# EAGLE board ASM2027 (EAGLE 6.3)
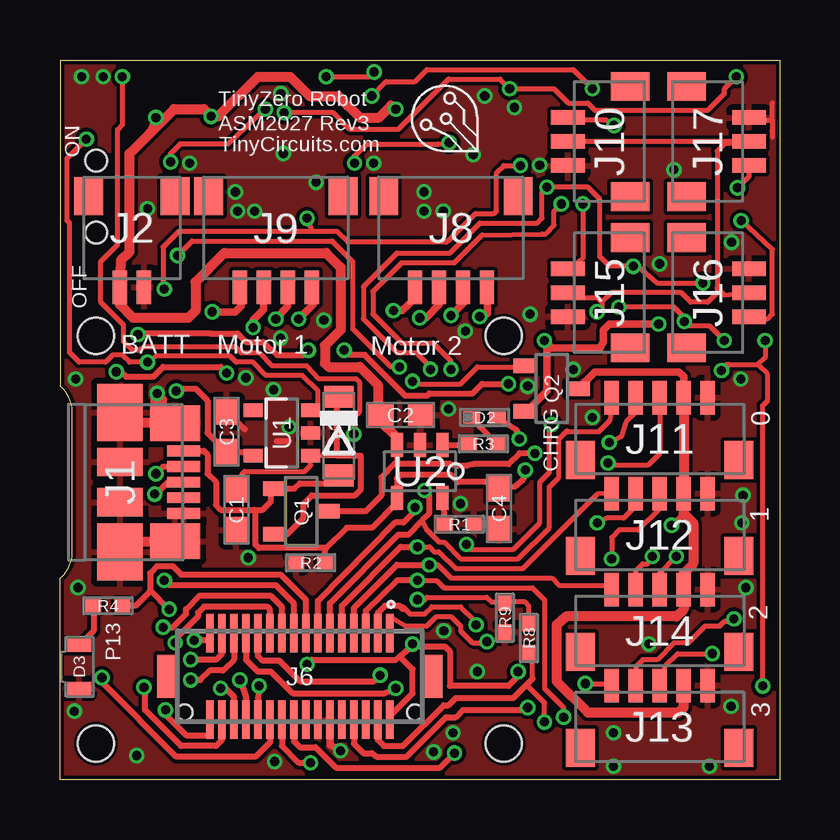
[diagram p0: board, top side]
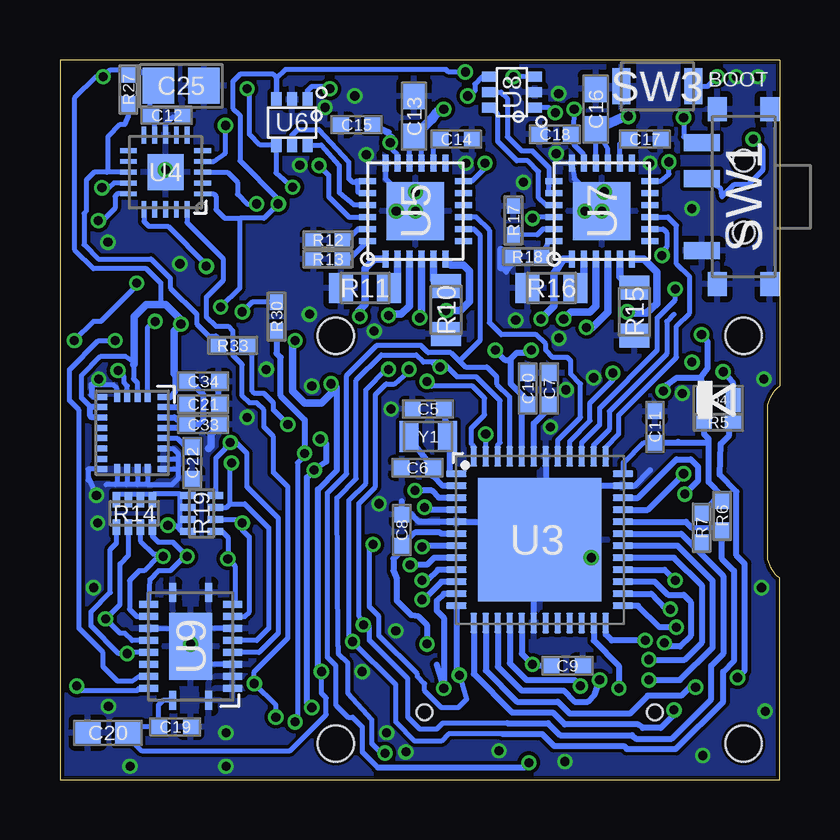
[diagram p1: board, bottom side, seen from below]

Size 30 x 30 mm. Coordinates in mm from the lower left corner, seen from the top.
Outline: 0,30 0,16.4 arc-45 0.5,15.5 0.5,9.3 arc-45 0,8.4 0,0 30,0 30,30 0,30
Copper layers (1*16): Top 0.035mm / dielectric 1.5mm / Bottom 0.035mm
Design rules "default *": minimum track width 8mil, minimum drill 15mil, track to track 6mil, track to pad 6mil, pad to pad 6mil, via to via 6mil, smd to smd 6mil, copper to edge 6mil, drill to drill 8mil, minimum pad ring 8mil, minimum via ring 5mil, stop-mask expansion 4mil, vias tented up to drill 25mil, thermal gap 10mil
Holes 1.5 mm at 1.5,18.5 18.5,18.5 1.5,1.5 18.5,1.5
bRestrict: 15 lines

## Footprints (pad centres in the part's own frame; a part is rotated, then mirrored left to right if it is on the bottom)
C0603 = smd 1.1 x 1: 1 -0.85,0; 2 0.85,0
C0402 = smd 0.65 x 0.6: 1 -0.65,0; 2 0.65,0
C0805 = smd 1.3 x 1.5: 1 -0.95,0; 2 0.95,0
SOD-123FL = smd 0.914 x 1.219: A 1.638,0; C -1.638,0
0402_LED = smd 0.7 x 0.5: 1 -0.55,0; 2 0.55,0
LNJ_LED = smd 1 x 0.55: A 0,0.9; C 0,-0.9
0603 = smd 0.61 x 0.991: A 0.622,0; C -0.622,0
MICRO_USB = smd 1.38 x 0.45: 1 2.66,1.3; 2 2.66,0.65; 3 2.66,0; 4 2.66,-0.65; 5 2.66,-1.3 | smd 2.1 x 1.475: P1 2.3,-2.462; P2 2.3,2.462 | smd 1.9 x 2.375: P3 0,2.913; P4 0,-2.913 | smd 1.9 x 1.175: P5 0,0.838; P6 0,-0.838
JST_SH_2X1 = smd 0.6 x 1.4: 1 -0.5,2.475; 2 0.5,2.475 | smd 1.2 x 1.6: PAD1 -1.8,-1.325; PAD2 1.8,-1.325
DF12-32-DP = smd 0.3 x 1.6: 1 -3.75,-1.8; 2 -3.75,1.8; 3 -3.25,-1.8; 4 -3.25,1.8; 5 -2.75,-1.8; 6 -2.75,1.8; 7 -2.25,-1.8; 8 -2.25,1.8; 9 -1.75,-1.8; 10 -1.75,1.8; 11 -1.25,-1.8; 12 -1.25,1.8; 13 -0.75,-1.8; 14 -0.75,1.8; 15 -0.25,-1.8; 16 -0.25,1.8; 17 0.25,-1.8; 18 0.25,1.8; 19 0.75,-1.8; 20 0.75,1.8; 21 1.25,-1.8; 22 1.25,1.8; 23 1.75,-1.8; 24 1.75,1.8; 25 2.25,-1.8; 26 2.25,1.8; 27 2.75,-1.8; 28 2.75,1.8; 29 3.25,-1.8; 30 3.25,1.8; 31 3.75,-1.8; 32 3.75,1.8 | smd 0.9 x 1.8: F1 -5.5,0; F2 5.5,0 | hole 0.65: -4.8,1.5; 4.8,1.5
JST_SH_4X1 = smd 0.6 x 1.4: 1 -1.5,2.475; 2 -0.5,2.475; 3 0.5,2.475; 4 1.5,2.475 | smd 1.2 x 1.6: PAD1 -2.8,-1.325; PAD2 2.8,-1.325
JST_SH_3X1_VERT = smd 0.6 x 1.4: 1 -1,-1.725; 2 0,-1.725; 3 1,-1.725 | smd 1.2 x 1.6: PAD1 -2.3,0.875; PAD2 2.3,0.875
JST_SH_5X1_VERT = smd 0.6 x 1.4: 1 -2,-1.725; 2 -1,-1.725; 3 0,-1.725; 4 1,-1.725; 5 2,-1.725 | smd 1.2 x 1.6: PAD1 -3.3,0.875; PAD2 3.3,0.875
SOT23A = smd 0.6 x 1: B -0.95,-1.1; C 0,1.1; E 0.95,-1.1
0402 = smd 0.65 x 0.55: 1 -0.6,0; 2 0.6,0
R0805 = smd 1 x 1.25: 1 -1,0; 2 1,0
0402RPACK = smd 0.3 x 0.65: 1 -0.75,0.575; 2 -0.75,-0.575; 3 -0.25,0.575; 4 -0.25,-0.575; 5 0.25,0.575; 6 0.25,-0.575; 7 0.75,0.575; 8 0.75,-0.575
PCM12SMTR = smd 0.7 x 1.5: 1 -2.25,1.75; 2 0.75,1.75; 3 2.25,1.75 | smd 1 x 0.8: W1 -3.65,1.1; W2 -3.65,-1.1; W3 3.65,-1.1; W4 3.65,1.1 | hole 0.9: 1.5,0; -1.5,0
KXT_LHS = smd 1.5 x 0.75: 1 0,1.5; 2 0,-1.5
SOT-25 = smd 0.55 x 0.8: 1 -0.95,-1.2; 2 0,-1.2; 3 0.95,-1.2; 4 0.95,1.2; 5 -0.95,1.2
SOT-23 = smd 0.5 x 1: 1 -0.95,-1.1; 2 0,-1.1; 3 0.95,-1.1; 4 0.95,1.1; 5 -0.95,1.1
QFN48 = smd 0.85 x 0.28: 1 -3.475,2.75; 2 -3.475,2.25; 3 -3.475,1.75; 4 -3.475,1.25; 5 -3.475,0.75; 6 -3.475,0.25; 7 -3.475,-0.25; 8 -3.475,-0.75; 9 -3.475,-1.25; 10 -3.475,-1.75; 11 -3.475,-2.25; 12 -3.475,-2.75; 25 3.475,-2.75; 26 3.475,-2.25; 27 3.475,-1.75; 28 3.475,-1.25; 29 3.475,-0.75; 30 3.475,-0.25; 31 3.475,0.25; 32 3.475,0.75; 33 3.475,1.25; 34 3.475,1.75; 35 3.475,2.25; 36 3.475,2.75 | smd 0.28 x 0.85: 13 -2.75,-3.475; 14 -2.25,-3.475; 15 -1.75,-3.475; 16 -1.25,-3.475; 17 -0.75,-3.475; 18 -0.25,-3.475; 19 0.25,-3.475; 20 0.75,-3.475; 21 1.25,-3.475; 22 1.75,-3.475; 23 2.25,-3.475; 24 2.75,-3.475; 37 2.75,3.475; 38 2.25,3.475; 39 1.75,3.475; 40 1.25,3.475; 41 0.75,3.475; 42 0.25,3.475; 43 -0.25,3.475; 44 -0.75,3.475; 45 -1.25,3.475; 46 -1.75,3.475; 47 -2.25,3.475; 48 -2.75,3.475 | smd 5.15 x 5.15: EXP 0,0
VQFN-20 = smd 0.7 x 0.2: 1 -1.55,0.9; 2 -1.55,0.45; 3 -1.55,0; 4 -1.55,-0.45; 5 -1.55,-0.9; 11 1.55,-0.9; 12 1.55,-0.45; 13 1.55,0; 14 1.55,0.45; 15 1.55,0.9 | smd 0.2 x 0.7: 6 -0.9,-1.55; 7 -0.45,-1.55; 8 0,-1.55; 9 0.45,-1.55; 10 0.9,-1.55; 16 0.9,1.55; 17 0.45,1.55; 18 0,1.55; 19 -0.45,1.55; 20 -0.9,1.55 | smd 1.5 x 1.5: PAD 0,0
VQFN-24_4X4 = smd 0.7 x 0.25: 1 -2,1.25; 2 -2,0.75; 3 -2,0.25; 4 -2,-0.25; 5 -2,-0.75; 6 -2,-1.25; 13 2,-1.25; 14 2,-0.75; 15 2,-0.25; 16 2,0.25; 17 2,0.75; 18 2,1.25 | smd 0.25 x 0.7: 7 -1.25,-2; 8 -0.75,-2; 9 -0.25,-2; 10 0.25,-2; 11 0.75,-2; 12 1.25,-2; 19 1.25,2; 20 0.75,2; 21 0.25,2; 22 -0.25,2; 23 -0.75,2; 24 -1.25,2 | smd 2.4 x 2.4: PAD 0,0
SOT-353-6 = smd 0.42 x 0.6: 1 -0.65,-0.95; 2 0,-0.95; 3 0.65,-0.95; 4 0.65,0.95; 5 0,0.95; 6 -0.65,0.95
VQFN-20_4.5X3.5 = smd 0.8 x 0.3: 1 -2.25,-0.75; 10 2.25,-0.75; 11 2.25,0.75; 20 -2.25,0.75 | smd 0.3 x 0.8: 2 -1.75,-1.75; 3 -1.25,-1.75; 4 -0.75,-1.75; 5 -0.25,-1.75; 6 0.25,-1.75; 7 0.75,-1.75; 8 1.25,-1.75; 9 1.75,-1.75; 12 1.75,1.75; 13 1.25,1.75; 14 0.75,1.75; 15 0.25,1.75; 16 -0.25,1.75; 17 -0.75,1.75; 18 -1.25,1.75; 19 -1.75,1.75 | smd 2.8 x 1.8: PAD 0,0
LGA-24 = smd 0.25 x 0.5: 1 -1.505,1.3; 6 -1.505,-1.3; 7 -1.075,-1.3; 8 -0.645,-1.3; 9 -0.215,-1.3; 10 0.215,-1.3; 11 0.645,-1.3; 12 1.075,-1.3; 13 1.505,-1.3; 18 1.505,1.3; 19 1.075,1.3; 20 0.645,1.3; 21 0.215,1.3; 22 -0.215,1.3; 23 -0.645,1.3; 24 -1.075,1.3 | smd 0.5 x 0.25: 2 -1.55,0.645; 3 -1.55,0.215; 4 -1.55,-0.215; 5 -1.55,-0.645; 14 1.55,-0.645; 15 1.55,-0.215; 16 1.55,0.215; 17 1.55,0.645
ABS06 = smd 0.8 x 1.3: 1 -0.8,0; 2 0.8,0

## Placement (x,y rotation side)
C1  10uF  [C0603]  7.35,11.25 270 top
C2  4.7uF  [C0603]  14.2,15.2 0 top
C3  10uF  [C0603]  6.95,14.5 90 top
C4  10uF  [C0603]  18.3,11.3 270 top
C5  22pF  [C0402]  14.65,15.45 180 bottom
C6  22pF  [C0402]  15.1,13 180 bottom
C7  .1uF  [C0402]  9.6,16.3 90 bottom
C8  .1uF  [C0402]  15.75,10.4 90 bottom
C9  .1uF  [C0402]  8.85,4.75 0 bottom
C10  .1uF  [C0402]  10.5,16.3 90 bottom
C11  .1uF  [C0402]  5.2,14.7 90 bottom
C12  0.1uF  [C0402]  25.55,27.7 0 bottom
C13  10uF  [C0603]  15.23,27.65 90 bottom
C14  10nF  [C0402]  13.48,26.7 0 bottom
C15  4.7uF  [C0402]  17.63,27.3 180 bottom
C16  10uF  [C0603]  7.66,27.95 90 bottom
C17  10nF  [C0402]  5.61,26.7 0 bottom
C18  4.7uF  [C0402]  9.36,26.9 180 bottom
C19  0.1uF  [C0402]  25.2,2.2 0 bottom
C20  10uF  [C0603]  28,1.95 180 bottom
C21  0.1uF  [C0402]  24.03,15.65 0 bottom
C22  10nF  [C0402]  24.48,13.2 270 bottom
C25  10uF  [C0805]  24.95,28.92 0 bottom
C33  0.1uF  [C0402]  24.03,14.8 0 bottom
C34  4.7uF  [C0402]  24.03,16.6 0 bottom
D1  MBR120  [SOD-123FL]  11.62,14.32 270 top
D2  AMBER  [0402_LED]  17.7,15.1 180 top
D3  GREEN  [LNJ_LED]  0.8,4.7 0 top
D4  CD0603  [0603]  2.55,15.82 0 bottom
J1  47346-0001  [MICRO_USB]  2.5,12.4 0 top
J2  SM02B-SRSS  [JST_SH_2X1]  3,23 180 top
J6  DF12-32-DP  [DF12-32-DP]  10,4.3 180 top
J8  SM04B  [JST_SH_4X1]  16.3,23 180 top
J9  SM04B  [JST_SH_4X1]  9,23 180 top
J10  SM03B-SRSS-TB  [JST_SH_3X1_VERT]  22.9,26.6 270 top
J11  SM05B  [JST_SH_5X1_VERT]  25,14.2 180 top
J12  SM05B  [JST_SH_5X1_VERT]  25,10.2 180 top
J13  SM05B  [JST_SH_5X1_VERT]  25,2.2 180 top
J14  SM05B  [JST_SH_5X1_VERT]  25,6.2 180 top
J15  SM03B-SRSS-TB  [JST_SH_3X1_VERT]  22.9,20.3 270 top
J16  SM03B-SRSS-TB  [JST_SH_3X1_VERT]  27,20.3 90 top
J17  SM03B-SRSS-TB  [JST_SH_3X1_VERT]  27,26.6 90 top
Q1  DMP2035U  [SOT23A]  10.06,11.18 270 top
Q2  DMP2035U  [SOT23A]  20.5,16.3 270 top
R1  5.0K  [0402]  16.65,10.65 0 top
R2  100k  [0402]  10.45,9.04 0 top
R3  1k  [0402]  17.65,14 180 top
R4  1k  [0402]  2,7.25 0 top
R5  10K  [0402]  2.55,14.9 180 bottom
R6  10K  [0402]  2.4,11 90 bottom
R7  10K  [0402]  3.25,10.5 90 bottom
R8  1M  [0402]  19.55,5.9 270 top
R9  1M  [0402]  18.55,6.75 90 top
R10  0.1  [R0805]  13.9,19.58 90 bottom
R11  0.1  [R0805]  17.28,20.5 0 bottom
R12  49.9K  [0402]  18.83,22.5 0 bottom
R13  49.9K  [0402]  18.83,21.7 0 bottom
R14  10K  [0402RPACK]  26.9,11.1 0 bottom
R15  0.1  [R0805]  6.05,19.51 90 bottom
R16  0.1  [R0805]  9.51,20.5 0 bottom
R17  49.9K  [0402]  11.1,23.31 270 bottom
R18  49.9K  [0402]  10.51,21.8 0 bottom
R19  10K  [0402RPACK]  24.1,11.1 90 bottom
R27  10.0K  [0402]  27.15,28.77 90 bottom
R30  0.0  [0402]  20.97,19.3 90 bottom
R33  1K  [0402]  22.8,18.1 180 bottom
SW1  PCM12SMTR  [PCM12SMTR]  1.5,24.3 90 bottom
SW3  KXT 331 LHS  [KXT_LHS]  5.1,28.9 270 bottom
U1  XC6210B33  [SOT-25]  9.25,14.45 90 top
U2  MCP73831  [SOT-23]  15,12.85 180 top
U3  ATSAMD21G18A  [QFN48]  10,10 0 bottom
U4  ATTINY841  [VQFN-20]  25.6,25.32 180 bottom
U5  DRV8834  [VQFN-24_4X4]  15.18,23.7 90 bottom
U6  MCP4018-10K  [SOT-353-6]  20.33,27.4 180 bottom
U7  DRV8834  [VQFN-24_4X4]  7.41,23.7 90 bottom
U8  MCP4018-10K  [SOT-353-6]  11.15,28.66 90 bottom
U9  PCA9544A  [VQFN-20_4.5X3.5]  24.55,5.55 90 bottom
U16  LSM9DS1  [LGA-24]  26.98,14.45 270 bottom
U$1  [DOCFIELD-TINYCIRCUITS-PCB]  41,-10 0 top  (outside the outline)
Y1  32.7680  [ABS06]  14.65,14.3 180 bottom

## Library data of the parts
C1 C4 = tinycircuits; DATABASE: ./../../../../../Components/TinyCircuits_Part_Database.txt; PARTNO: AS-ITM-00002
C2 = tinycircuits; DATABASE: ./../../../../../Components/TinyCircuits_Part_Database.txt; PARTNO: AS-ITM-00088
C3 C13 C16 C20 = tinycircuits; PARTNO: AS-ITM-00002
C5 C6 = tinycircuits; PARTNO: AS-ITM-00211
C7 C9 C10 = tinycircuits; DATABASE: ./../../../../../Components/TinyCircuits_Part_Database.txt; PARTNO: AS-ITM-00008; VALUE: 0.1uF
C8 C11 = tinycircuits; PARTNO: AS-ITM-00008; VALUE: 0.1uF
C12 C19 C21 = tinycircuits; PARTNO: AS-ITM-00008
C14 C17 C22 = tinycircuits; PARTNO: AS-ITM-00084
C15 C18 = tinycircuits; PARTNO: AS-ITM-00242
C25 = tinycircuits; PARTNO: AS-ITM-00045
C33 = tinycircuits; DATABASE: ./../../../../../Components/TinyCircuits_Part_Database.txt; PARTNO: AS-ITM-00008
C34 = tinycircuits; DATABASE: ./../../../../../Components/TinyCircuits_Part_Database.txt; PARTNO: AS-ITM-00242
D1 = tinycircuits; PARTNO: AS-ITM-00111; PNPROTATION: 0; VALUE: MBR120VLSFT1G
D2 = tinycircuits; DATABASE: ./../../../../../Components/TinyCircuits_Part_Database.txt; PARTNO: AS-ITM-00058
D3 = tinycircuits; PARTNO: AS-ITM-00011; PNPROTATION: 90
D4 = tinycircuits; PARTNO: AS-ITM-00009; PNPROTATION: 0
J1 = tinycircuits; PARTNO: AS-ITM-00021; PNPROTATION: 90
J2 = tinycircuits; PARTNO: AS-ITM-00231; PNPROTATION: 180; VALUE: SM02B-SRSS-TB(LF)(SN)
J6 = tinycircuits; PARTNO: AS-ITM-00015; PNPROTATION: 0
J8 J9 = tinycircuits; PARTNO: AS-ITM-00395; VALUE: SM05B
J10 J15-J17 = tinycircuits; PARTNO: AS-ITM-00471; VALUE: BM03B-SRSS-TB(LF)(SN)
J11-J14 = tinycircuits; PARTNO: AS-ITM-00391; PNPROTATION: 0; VALUE: BM05B
Q1 = tinycircuits; PARTNO: AS-ITM-00024; PNPROTATION: 0
Q2 = tinycircuits; DATABASE: ./../../../../../Components/TinyCircuits_Part_Database.txt; PARTNO: AS-ITM-00024; PNPROTATION: 0
R1 = tinycircuits; PARTNO: AS-ITM-00289; VALUE: 5K
R2 = tinycircuits; PARTNO: AS-ITM-00004; VALUE: 100K
R3 = tinycircuits; DATABASE: ./../../../../../Components/TinyCircuits_Part_Database.txt; PARTNO: AS-ITM-00003; VALUE: 1.00K
R4 R33 = tinycircuits; PARTNO: AS-ITM-00003; VALUE: 1.00K
R5 R6 = tinycircuits; PARTNO: AS-ITM-00032; VALUE: 10.0K
R7 = tinycircuits; DATABASE: ./../../../../../Components/TinyCircuits_Part_Database.txt; PARTNO: AS-ITM-00032; VALUE: 10.0K
R8 R9 = tinycircuits; DATABASE: ./../../../../../Components/TinyCircuits_Part_Database.txt; PARTNO: AS-ITM-00005; VALUE: 1.00M
R10 R11 R15 R16 = tinycircuits; PARTNO: AS-ITM-00157
R12 R13 R17 R18 = tinycircuits; PARTNO: AS-ITM-00074
R14 R19 = tinycircuits; PARTNO: AS-ITM-00520
R27 = tinycircuits; PARTNO: AS-ITM-00032
R30 = tinycircuits; PARTNO: AS-ITM-00076
SW1 = tinycircuits; PARTNO: AS-ITM-00220; PNPROTATION: 0
SW3 = tinycircuits; PARTNO: AS-ITM-00372
U1 = tinycircuits; PARTNO: AS-ITM-00046; PNPROTATION: 270
U2 = tinycircuits; PARTNO: AS-ITM-00136; PNPROTATION: 270
U3 = tinycircuits; PARTNO: AS-ITM-00273; PNPROTATION: 270
U4 = tinycircuits; PARTNO: AS-ITM-00255; PNPROTATION: 0
U5 U7 = tinycircuits; PARTNO: AS-ITM-00392; PNPROTATION: 0
U6 U8 = tinycircuits; PARTNO: AS-ITM-00393; PNPROTATION: 90
U9 = tinycircuits; PARTNO: AS-ITM-00342; PNPROTATION: 0
U16 = tinycircuits; PARTNO: AS-ITM-00265; PNPROTATION: 0
U$1 = tinycircuits; NO_BOM: TRUE
Y1 = tinycircuits; PARTNO: AS-ITM-00279; PNPROTATION: 0

## Nets
3V3: J11.2 J12.2 J13.2 J14.2 Q2.C R14.1 R14.3 R14.5 R14.7 R19.1 R19.3 R19.5 R19.7
+3V3: J6.6
+5V: C4.1 D1.A D2.1 J1.1 J6.8 Q1.B R2.2 U2.4
AD0: J6.11 J11.5 U3.3
AD1: J6.9 J12.5 U3.7
AD2: J6.7 J14.5 U3.8
AD3: J6.5 J13.5 U3.9 U4.20
AD4: R8.1 R9.2 U3.10
AD4/SDA: J6.3 R7.1 U3.31 U4.16 U6.4 U8.4 U9.19 U16.4
AD5: SW3.1 U3.47
AD5/SCL: J6.1 R6.1 U3.32 U4.1 U6.3 U8.3 U9.18 U16.2
AOUT1: J8.1 U5.1
AOUT2: J8.2 U5.3
AOUT3: J9.1 U7.1
AREF: J6.13 U3.4
ATN/IO38: U3.22
BOUT1: J8.4 U5.6
BOUT2: J8.3 U5.4
BOUT3: J9.4 U7.6
BOUT4: J9.3 U7.4
CE: SW1.2 U1.3
GND: C1.2 C2.2 C3.2 C4.2 C5.2 C6.2 C7.2 C8.2 C9.2 C10.2 C11.2 C12.2 C13.2 C14.2 C15.2 C16.2 C17.2 C18.2 C19.2 C20.2 C21.2 C22.2 C25.2 C33.2 C34.2 D3.C J1.5 J1.P1 J1.P2 J1.P3 J1.P4 J1.P5 J1.P6 J2.1 J6.12 J6.14 J10.3 J11.1 J12.1 J13.1 J14.1 J15.3 J16.3 J17.3 R1.2 R2.1 R9.1 R10.1 R11.1 R12.1 R13.1 R15.1 R16.1 R17.1 R18.1 SW1.1 SW1.W1 SW1.W2 SW1.W3 SW1.W4 SW3.2 U1.2 U2.2 U3.5 U3.18 U3.35 U3.42 U3.EXP U4.8 U4.PAD U5.18 U5.PAD U6.2 U7.18 U7.PAD U8.2 U9.1 U9.2 U9.3 U9.4 U9.7 U9.10 U9.11 U9.14 U9.PAD U16.5 U16.6 U16.13 U16.14 U16.15 U16.16 U16.17 U16.18 U16.19 U16.20
IO0: J6.24 U3.16
IO1: J6.26 U3.15
IO2: J6.28 U3.23
IO3: J6.30 U3.14
IO4: J6.32 U3.13
IO5: J6.31 U3.24
IO6: J6.29 U3.29
IO7: J6.27 U3.30
IO8: J6.25 U3.11
IO9: J6.23 R33.1 U3.12
IO25: Q2.B U3.48
IO26: U3.39 U5.22 U7.22
IO27: U3.41 U5.9
IO30: U3.37 U7.9
IO31: U3.38
MISO: J6.17 U3.28
MISO_ALT: U3.21
MOSI: J6.19 U3.25
MOSI_ALT: U3.19
N$1: C5.1 U3.1 Y1.1
N$2: U4.11
N$3: C6.1 U3.2 Y1.2
N$4: D3.A R4.1
N$5: D2.2 R3.1
N$6: R1.1 U2.5
N$7: R3.2 U2.1
N$8: C7.1 U3.43
N$9: R10.2 U5.5
N$10: R11.2 U5.2
N$11: U5.19 U5.20 U6.5
N$12: U5.21 U6.6
N$13: U4.12
N$14: C14.1 U5.14
N$15: R12.2 U5.23
N$16: R13.2 U5.24
N$17: U5.11
N$18: U5.10
N$20: U4.2
N$21: J9.2 U7.3
N$22: U4.5
N$23: U5.13
N$24: C15.1 U5.12 U5.17
N$27: R15.2 U7.5
N$28: R16.2 U7.2
N$29: U7.19 U7.20 U8.5
N$30: U7.21 U8.6
N$31: C17.1 U7.14
N$32: R17.2 U7.23
N$33: R18.2 U7.24
N$34: U7.11
N$35: U7.10
N$40: U7.13
N$41: C18.1 U7.12 U7.17
N$52: C22.1 U16.21
N$53: C21.1 U16.24
N$59: U16.9
N$60: U16.10
N$61: U16.11
N$62: U16.12
RESET: D4.A J6.22 R5.1 U3.40
RSV2: J6.16
S1: J10.1 U4.4
S2: J15.1 U4.3
S3: J16.1 U4.15
S4: J17.1 U4.14
SCK: J6.15 R4.2 U3.26
SCK_ALT: U3.20
SCL0: J11.3 R19.6 U9.6
SCL1: J12.3 R19.2 U9.9
SCL2: J14.3 R14.6 U9.13
SCL3: J13.3 R14.2 U9.16
SDA0: J11.4 R19.8 U9.5
SDA1: J12.4 R19.4 U9.8
SDA2: J14.4 R14.8 U9.12
SDA3: J13.4 R14.4 U9.15
SS: J6.21 U3.27
SWCLK: J6.20 U3.45 U5.8
SWDIO: J6.18 U3.46 U7.8
TINY_RST: R27.1 R33.2 U4.13
USB_N: J1.2 U3.33
USB_P: J1.3 U3.34
VBATT: C2.1 C13.1 C16.1 J2.2 J6.4 Q1.C R8.2 R30.1 SW1.3 U2.3 U5.15 U5.16 U7.15 U7.16
VCC: C3.1 C8.1 C9.1 C10.1 C11.1 C12.1 C19.1 C20.1 C25.1 C33.1 C34.1 D4.C J6.2 Q2.E R5.2 R6.2 R7.2 R27.2 U1.5 U3.6 U3.17 U3.36 U3.44 U4.9 U6.1 U8.1 U9.20 U16.1 U16.3 U16.7 U16.8 U16.22 U16.23
VCC_IN: C1.1 D1.C Q1.E U1.1
VIN: J6.10
VSERVO: J10.2 J15.2 J16.2 J17.2 R30.2

## Tracks (layer width: path | path; a pad name or v marks a point on that pad's centre or on a via)
3V3  (via drill 0.38)
  Top 0.203: 25.7,2.7 25.8,2.8 | v25.5,10.6 26,11.1
  Top 0.303: 22.4,17 22.3,17 Q2.C
  Top 0.305: J11.2 26,16.8 25.8,17 22.4,17
  Top 0.406: J11.2 J12.2 26,11.1 26.4,10.7 26.4,9 26,8.6 J14.2 26,7.1 25.7,6.8 21.1,6.8 20.7,6.45 20.7,4.1 22,2.8 25.8,2.8 26,3 J13.2
  Bottom 0.203: 25,10.4 24.95,10.35 R19.1 | 25,10.4 25,10.9 | 25,10.9 25,11.4 | 25,11.4 25,11.82 | 25,11.82 R19.7 | R19.3 24.95,10.85 25,10.9 | R19.5 24.95,11.35 25,11.4 | 25,11.82 25,11.9 26.12,11.9 | 26.12,11.9 R14.7 | R14.1 27.7,11.73 27.7,11.9 27.2,11.9 | 27.2,11.9 26.6,11.9 | 26.6,11.9 26.12,11.9 | R14.3 27.2,11.73 27.2,11.9 | R14.5 26.6,11.73 26.6,11.9 | 25,10.4 25.2,10.6 v25.5,10.6
+5V  (via drill 0.38)
  Top 0.254: J6.8 12.25,1.5 12.65,1.1 13,1.1 13.2,0.95 14.45,0.95 16.1,2.6 16.5,2.6 16.8,2.9 19.4,2.9 v19.5,3 | J1.1 6,13.7 6.15,13.55 6.15,12.75 6.5,12.4 6.5,11.45 6.7,11.25 8.1,11.25 | 8.1,11.25 8.45,11.25 8.8,11.6 8.8,12.02 Q1.B 9.78,12.13 10,12.35 11.39,12.35 D1.A | D2.1 19,14.6 v19.15,14.2 | v19.4,12.9 19.3,12.5 18.95,12.2 C4.1 18.25,12.5 18.1,12.6 17.9,12.4 16.6,12.4 16.3,12.7 14.2,12.7 14.05,12.55 U2.4 14.05,11.55 13,10.5 11.95,10.5 11.1,9.65 | 11.1,9.65 8.3,9.65 8.15,9.8 8.15,11.2 8.1,11.25 | R2.2 11.05,9.6 11.1,9.65
  Bottom 0.254: v19.15,14.2 18.9,14 18.9,13.25 v19.4,12.9 19.7,12.6 19.7,3.2 v19.5,3
AD0  (via drill 0.38)
  Top 0.203: J11.5 22.92,14.98 22.45,14.5 21.15,14.5 21.15,14.55 20.8,14.2 20.8,12.6 20.4,12.2 20.4,10.5 19.1,9.2 16.7,9.2 16,9.9 15.8,9.9 15.3,10.4 15.1,10.8
  Top 0.254: J6.11 11.25,7.35 14.1,10.2 14.5,10.2 15.1,10.8 15.4,11.1 15.4,11.85 v15.2,12.05
  Bottom 0.254: U3.3 14.2,11.75 14.5,12.05 v15.2,12.05
AD1  (via drill 0.38)
  Top 0.203: J12.5 22.4,11.9 19.3,8.8 16.5,8.8 15.8,9.5 15.6,9.5 15.4,9.7 v14.9,9.7
  Top 0.254: J6.9 11.75,7.25 14.2,9.7 v14.9,9.7
  Bottom 0.254: U3.7 14.75,9.75 v14.9,9.7
AD2  (via drill 0.38)
  Top 0.203: v15.4,8.95 15.75,8.95 16.3,8.4 20.5,8.4 20.8,8.1 22.83,8.1 J14.5
  Top 0.254: J6.7 12.25,7.15 14.05,8.95 v15.4,8.95
  Bottom 0.254: U3.8 14.4,9.25 14.7,8.95 v15.4,8.95
AD3  (via drill 0.38)
  Top 0.203: v14.9,8.3 15.7,8.3 16,8 19.7,8 20.2,7.5 20.2,3.8 21,3 v21,2.6 | v21.9,4 22.8,4 22.9,3.9 22.98,3.9 J13.5
  Top 0.254: J6.5 12.75,7.05 14.05,8.3 v14.9,8.3
  Bottom 0.203: U4.20 24.7,23.22 23.2,21.72 23.2,20.8 23.9,20.1 23.9,19.3 23.5,18.9 23,18.9 22.8,18.7 22.8,17.7 22.4,17.3 22.4,16 22.1,15.7 21.8,15.7 21.5,15.4 21.5,14.7 21.1,14.3 21.1,12.8 20.5,12.2 20.5,5.9 21.9,4.5 v21.9,4 21,3.1 v21,2.6
  Bottom 0.254: U3.9 14.25,8.75 14.7,8.3 v14.9,8.3
AD4  (via drill 0.38)
  Top 0.203: R8.1 19.55,7.25 19.4,7.4 18.6,7.4 R9.2 18.5,7.4 18,7.4 17.8,7.6 15.3,7.6 15.2,7.5 v14.9,7.5
  Bottom 0.254: U3.10 14.1,8.25 14.75,7.6 15.05,7.6 14.95,7.5 v14.9,7.5
AD4/SDA  (via drill 0.38)
  Top 0.203: v17.35,6.45 17.25,6.65 16.7,7.2 15.5,7.2 15.2,6.9 14.6,6.9 14.3,7.2 14.3,7.1 | v27.58,17.05 27.68,17.08 27.9,17.3 | 27.9,17.3 29.1,17.3 | v15.45,17.1 15.55,17.1 14.85,17.8 14.05,17.8 12.65,19.2 12.65,20.55 14.05,21.95 16.25,21.95 17.5,23.2 19.9,23.2 20.1,23.4 20.1,24.5 v20.3,24.7 22,24.7 22.5,24.2 22.5,21.8 22.9,21.4 v23.9,21.4 24.1,21.4 24.9,20.7 v26.8,20.7 | v13,28.5 13.6,29.1 14.8,29.1 15.3,29.6 21.4,29.6 v22.2,28.8 | v29.3,3.9 29.3,15.6 29.5,15.8 29.5,16.9 29.1,17.3 | 27.9,17.3 27.8,17.3 27.6,17.1 | v29.4,18.3 29.4,17.6 29.1,17.3
  Top 0.254: J6.3 13.25,6.95 13.55,7.25 14.15,7.25 14.3,7.1
  Bottom 0.203: U16.4 27.2,16.41 27.33,16.55 27.33,16.8 v27.58,17.05 | v13,28.5 12.7,28.7 12.7,29 12.4,29.3 12.01,29.3 U8.4 | U4.16 26.5,23.27 26.3,23.07 25.5,23.07 23.9,21.47 v23.9,21.4 | U9.19 26.7,3.8 26.8,3.7 29.1,3.7 v29.3,3.9 | v22.2,28.8 22.1,28.7 22.1,26.9 21.65,26.45 U6.4 21,26.4 21,25.3 v20.3,24.7 | v26.8,20.7 26.8,20.6 28.3,19.1 28.6,19.1 v29.4,18.3 | 11.35,2.35 14.05,2.35 14.3,2.1 15,2.1 15.5,2.6 15.5,4.2 17.1,5.8 17.1,6.4 v17.35,6.45 17.55,6.85 17.55,11.5 16.85,12.2 16.85,16.05 16.4,16.5 16.05,16.5 15.5,17 15.45,17.05 v15.45,17.1
  Bottom 0.254: U3.31 4.1,10.25 3.53,9.68 | 3.53,9.68 2.35,8.5 2.35,5.25 2.85,4.75 2.85,3.35 4.5,1.7 6,1.7 6.15,1.85 9.15,1.85 9.65,2.35 11.35,2.35 | R7.1 3.47,9.68 3.53,9.68
AD5  (via drill 0.38)
  Top 0.203: v12.25,14.4 12.15,14.6 12.3,14.75 12.3,15.15 12.5,15.35 12.5,16.55 12.35,16.7 10.8,16.7 10.3,17.25 8.85,17.25 8.3,17.8 7.55,17.8 7.3,18.05 3.55,18.05 3.25,17.9 3,17.9 2.65,18.25 2.65,18.95 1.7,19.9 1.7,21.6 2.4,22.3 2.4,27.1 2.6,27.3 v2.6,29.3
  Bottom 0.203: U3.47 v12.25,14.4 | SW3.1 3,28.9 v2.6,29.3
AD5/SCL  (via drill 0.38)
  Top 0.203: v16.3,17.1 16.3,17.45 15.55,18.2 14.25,18.2 13.05,19.4 13.05,20.35 14.25,21.55 16.45,21.55 17.6,22.7 20.1,22.75 20.25,22.75 20.6,23.1 20.6,23.7 v20.9,24 | v11.1,29.3 12.9,29.3 v13.1,29.5 | v27.7,18.3 27.1,18.9 26.13,18.9 v26.03,19.1 26.03,19.27 25.6,19.7 v23.3,19.7 | 13.75,6.75 13.85,6.75 14.4,6.4 15.3,6.4 15.7,6.8 16.3,6.8 16.7,6.4 16.7,6.2 17.2,5.7 17.75,5.7 v17.8,5.75
  Top 0.254: J6.1 13.75,6.75
  Bottom 0.203: 3.65,10.5 2.6,10.5 2.5,10.4 R6.1 | U16.2 26.34,18.86 26.1,19.1 v26.03,19.1 | U8.3 10.99,29.31 v11.1,29.3 | v13.1,29.5 13.8,29.5 13.9,29.6 20.6,29.6 20.98,29.22 U6.3 20.88,28.37 20.95,28.3 20.95,29.25 21.1,29.4 22.5,29.4 22.8,29.1 22.8,28 22.5,27.7 22.5,25.8 20.9,24.2 v20.9,24 21.5,23.4 22.5,23.4 | U4.1 23.6,24.42 23.5,24.32 23.5,23.77 23.13,23.4 22.5,23.4 | U9.18 26.7,4.3 27,4.1 27.6,4.1 28.2,4.7 28.2,5.3 29.2,6.3 29.2,15.4 29.6,15.8 29.6,17.1 28.4,18.3 v27.7,18.3 | 22.5,23.4 22.5,20.5 v23.3,19.7 | 11.55,1.9 13.8,1.9 14.1,1.6 15.2,1.6 16,2.4 16,3.95 v17.8,5.75 17.95,5.9 17.95,11.65 17.25,12.35 17.25,16.25 16.4,17.1 v16.3,17.1
  Bottom 0.254: U3.32 3.9,10.75 3.65,10.5 | 11.55,1.9 9.9,1.9 9.4,1.4 6.5,1.4 6.38,1.28 4.32,1.28 2.35,3.25 2.35,4.5 1.9,4.95 1.9,8.7 2.4,9.2 R6.1
AOUT1  (via drill 0.38)
  Top 0.305: J8.1 17.82,19.42 v17.5,19.3
  Bottom 0.305: U5.1 16.88,21.7 17.28,21.3 17.28,19.8 17.55,19.53 v17.5,19.3
AOUT2  (via drill 0.38)
  Top 0.305: v16.3,19.35 16.82,19.87 J8.2
  Bottom 0.305: U5.3 15.43,19.75 15.78,19.4 16.2,19.4 v16.3,19.35
AOUT3  (via drill 0.38)
  Top 0.305: v9.95,19.2 10.55,19.8 10.55,20.36 J9.1
  Bottom 0.305: U7.1 9.01,21.7 9.41,21.1 9.41,19.74 v9.95,19.2
AREF  (via drill 0.38)
  Top 0.254: J6.13 10.75,7.45 13.98,10.72 14.32,10.72 14.8,11.2 v14.8,11.35
  Bottom 0.254: U3.4 14.6,11.25 v14.8,11.35
BOUT1  (via drill 0.38)
  Top 0.305: v13.9,19.55 14.25,19.55 14.8,20.05 J8.4
  Bottom 0.305: U5.6 13.93,21.68 13.7,21.45 13.18,21.45 12.93,21.2 12.93,19.92 13.3,19.55 v13.9,19.55
BOUT2  (via drill 0.38)
  Top 0.305: J8.3 15.82,19.82 15.25,19.25 v15,19.25
  Bottom 0.305: U5.4 14.93,19.45 14.89,19.21 14.9,19.2 v15,19.25
BOUT3  (via drill 0.38)
  Top 0.305: v6.35,19.5 7.3,19.5 7.55,19.75 7.55,20.36 J9.4
  Bottom 0.305: U7.6 5.66,21.7 5.11,21.15 5.11,19.84 5.55,19.45 6.2,19.45 v6.35,19.5
BOUT4  (via drill 0.38)
  Top 0.305: J9.3 8.49,19.59 8.05,19.15 v8.05,18.85
  Bottom 0.305: U7.4 7.16,19.5 7.81,18.85 v8.05,18.85
CE  (via drill 0.38)
  Top 0.203: U1.3 10.5,15.4 10.75,15.65 10.75,16.2 10.1,16.85 8.6,16.85 8.05,17.4 7.35,17.4 7.1,17.65 4,17.65 v3.65,17.4 2.9,17.4 2.6,17.7 2.2,17.7 1.9,17.4 0.8,17.4 0.4,17.8 0.4,23.2 0.3,23.3 0.3,25.9 v1.1,26.7
  Bottom 0.203: SW1.2 2.45,24.65 2.4,24.3 1.9,24.8 1.3,24.8 0.7,25.4 0.7,26.3 v1.1,26.7
GND  (via drill 0.38)
  Top 0.203: 5.21,14.45 J1.P2 | 2.8,9.9 2.8,9.79 J1.P4 | J17.3 29.2,27.5 29.7,27.5 | 29.7,27.5 29.7,26.8 | 29.7,27.5 29.7,28.2
  Top 0.254: J1.P2 4.3,14.86 4.35,14.91 4.35,15.85 4.05,16.15 | 2.95,14.86 J1.P3 | 9.55,14.1 9.05,14.1 | C3.2 7.7,14.6 | 4.1,14.96 4.1,15.9 | 3.9,14.96 3.9,15.9
  Top 0.305: J6.12 11.25,1.45 v11.7,1.2 | C4.2 18.1,10.65 R1.2
  Top 0.406: 4.3,14.86 2.95,14.86 | 2.8,9.9 4.8,9.9 J1.P1
  Bottom 0.203: U5.18 16.43,25.05 16.18,24.8 16.18,24.7 U5.PAD | U7.18 8.56,25.05 8.31,24.8 8.31,24.7 U7.PAD | 23.38,16.75 23.38,16.67 C34.2 | U16.5 27.62,16.3 27.78,16.45 28.63,16.45 28.68,16.35 | 28.68,16.05 28.63,15.95 U16.6 | U16.20 25.28,13.8 25.08,13.6 25.08,13.35 | 25.08,13.35 25.08,12.9 | 25.08,12.9 25.08,12.55 25.33,12.3 26.28,12.3 26.34,12.36 U16.17 26.34,12.3 26.33,12.3 26.78,12.3 | U16.19 25.1,13.38 25.08,13.35 | U16.18 25.12,12.95 25.08,12.9 | 26.78,12.3 27.23,12.3 | 27.23,12.3 27.68,12.3 | 27.68,12.3 28.08,12.3 | U16.16 26.77,12.32 26.78,12.3 | U16.15 27.2,12.34 27.23,12.3 | U16.14 27.62,12.36 27.68,12.3 | U16.13 28.83,12.95 28.83,12.48 28.8,12.55 v28.48,11.85 | R18.1 11.11,21.54 11.4,21.15 11.4,21.23 11.41,21.24 | U4.8 25.6,27.32 25.3,27.62 C12.2 | 11.6,10 11.95,10.35 11.95,10.75 | U9.14 25.3,6.3 v24.55,5.65 | U9.4 23.8,4.8 v24.55,5.65 | U9.7 23.8,6.3 v24.55,5.65 | 11.41,22 11.61,22.1
  Bottom 0.254: U3.42 9.75,11.1 v7.85,9.25 | v7.85,9.25 U3.EXP | U3.EXP 11.6,10 | U3.18 10.25,9.75 U3.EXP | 5.4,12.9 6.05,12.25 U3.35 7.9,12.25 v7.85,9.25 | 15.75,11.6 C8.2 15.45,11.15 15.05,10.75 U3.5 11.95,10.75 | v28.38,16.7 28.68,16.45 28.68,16.35 28.68,16.05 | C21.2 23.38,16.67 arc-45 23.42,16.59 C34.2
  Bottom 0.303: C33.2 23.38,14.72 23.7,14.4 23.7,13.9 23.8,13.8
  Bottom 0.305: 11.61,22.1 11.61,21.34 | 11.41,22 11.41,21.24
  other vias: 3.2,1 0.6,2.85 17.4,4.5 16.2,15.45 9.2,18.4 0.65,16.7 4.05,16.1 8.9,16.25 8.95,0.75 9.55,14.7 16.7,11.5 0.9,29.3 13.08,25.7 15.18,24.5 15.98,23.7 15.18,23.7 17.23,26.05 18.95,28.02 5.41,25.7 7.31,24.5 8.11,23.7 7.41,23.7 9.31,26.1 9.21,28.6 22.2,15.1 1.8,29.3 7.75,16.75 11,19.15 28.43,10.7 16.9,18.7 17.71,28.5 25.6,25.42 19.6,19.4 25,21.5 28,22.4 20,25.62 3.65,23.8 0.75,8 10.68,24.9 16,6.2 23.08,0.55 27.08,0.55 27.98,3.05 23.08,1.95 28.6,8 16.38,1.95 15.58,1.15 19.5,16.4 21.4,17.1
  pour Top: 0,30 30,30 30,0 0,0
  pour Bottom: 0,30 30,30 30,0 0,0
IO0  (via drill 0.38)
  Top 0.254: v8.3,3.9 8.25,3.4 J6.24
  Bottom 0.254: v8.3,3.9 8.55,4.15 10.55,4.15 11.25,4.85 U3.16
IO1  (via drill 0.38)
  Top 0.254: v7.5,4.15 7.75,3.4 J6.26
  Bottom 0.254: U3.15 11.75,4.7 10.75,3.7 9,3.7 8.55,3.25 8,3.25 7.7,3.55 v7.5,4.15
IO2  (via drill 0.38)
  Top 0.254: J6.28 7.25,3.45 6.9,3.8 v6.7,3.8
  Bottom 0.254: U3.23 7.75,5.8 6.7,4.75 v6.7,3.8
IO3  (via drill 0.38)
  Top 0.254: J6.30 6.75,1.65 6.5,1.4 5.05,1.4 3.55,2.9 3.55,3.8 v3.5,3.85
  Bottom 0.254: U3.14 12.25,4.55 10.95,3.25 9.25,3.25 8.75,2.75 6.25,2.75 5.5,3.5 4.1,3.5 3.75,3.85 v3.5,3.85
IO4  (via drill 0.38)
  Top 0.254: J6.32 6.25,1.95 6.15,1.85 5.25,1.85 4.4,2.7 v4.4,2.9
  Bottom 0.254: U3.13 12.75,4.4 11.15,2.8 9.45,2.8 8.95,2.3 5.9,2.3 5.7,2.15 4.95,2.15 4.4,2.7 v4.4,2.9
IO5  (via drill 0.38)
  Top 0.254: J6.31 6.25,5.8 v5.6,5.8
  Bottom 0.254: v5.6,5.8 7,5.8 7.25,6.05 U3.24
IO6  (via drill 0.38)
  Top 0.254: J6.29 6.75,5.25 6.5,5 v5.45,5
  Bottom 0.254: U3.29 4.4,9.25 3.25,8.1 3.25,5.7 3.95,5 v5.45,5
IO7  (via drill 0.38)
  Top 0.254: J6.27 7.25,5 6.8,4.55 6.25,4.55 5.85,4.15 v5.45,4.15
  Bottom 0.254: U3.30 4.25,9.75 2.8,8.3 2.8,5.5 4.15,4.15 v5.45,4.15
IO8  (via drill 0.38)
  Top 0.254: J6.25 7.75,5 8.25,4.5 8.8,4.5 9.7,3.6 13.55,3.6 v14,3.8
  Bottom 0.254: U3.11 14,7.75 14.3,7.45 14.3,7.05 14,6.75 v14,3.8 14.3,4.8
IO9  (via drill 0.38)
  Top 0.203: v16.95,9.8 17.1,9.6 18.9,9.6 20,10.7 20,12.4 20.4,12.8 20.4,14.6 v20.5,14.8
  Top 0.254: J6.23 8.25,5.15 8.45,4.95 9.15,4.95 10,4.1 13.1,4.1 v13.35,4.35
  Bottom 0.203: 13.48,4.47 v13.35,4.35 13.05,3.35 13.4,3 14.1,3 14.8,3.7 14.8,4 15.1,4.3 15.1,4.4 16.7,6 16.7,6.8 17.1,7.2 17.1,9.6 16.95,9.75 v16.95,9.8 | v20.5,14.8 21.1,15.4 21.1,15.7 21.5,16.1 21.9,16.1 22,16.2 22,17.9 R33.1
  Bottom 0.254: U3.12 13.48,4.47
IO25  (via drill 0.38)
  Top 0.203: v14.7,16.6 14.8,16.5 16.7,16.5 17.4,17.2 19.35,17.2 Q2.B
  Bottom 0.203: U3.48 12.75,13.9 12.85,14 12.85,14.65 12.3,15.2 12.3,15.9 12.8,16.4 14.5,16.4 v14.7,16.6
IO26  (via drill 0.38)
  Top 0.203: 10.5,22.85 11.55,22.85 12,22.4 16.1,22.4 16.15,22.45 16.18,22.45 17.33,23.6 18.1,23.6 18.2,23.7 18.2,25.3 18.5,25.6 v19.2,25.6 | 10.5,22.85 4.95,22.85 4.3,22.2 4.3,20.6 v4.35,20.45 | v10.3,23.4 10.5,22.85
  Bottom 0.203: U3.39 8.25,14.05 7.5,14.8 7.5,15.5 5.1,17.9 5.1,19.25 4.35,20 4.35,20.4 v4.35,20.45 | v19.2,25.6 18.8,25.2 18.8,24.3 17.95,23.45 U5.22 | U7.22 10.25,23.45 v10.3,23.4
IO27
  Bottom 0.203: U3.41 9.25,14.15 8.3,15.1 8.3,16.5 8.7,16.9 8.7,17.45 8.85,17.6 9.45,17.6 9.75,17.9 9.75,18.15 10.15,18.55 11.6,18.55 12.1,19.05 12.1,22.9 12.65,23.45 U5.9
IO30
  Bottom 0.203: U3.37 7.23,13.32 7.23,13.88 6.7,14.4 6.7,15.2 4.3,17.6 4.3,18.9 3.75,19.45 3.75,20.95 4.3,21.5 4.3,23.1 4.65,23.45 U7.9
IO31
  Bottom 0.203: 4.4,19.4 4.7,19.1 4.7,17.75 7.1,15.35 7.1,14.6 7.75,13.95 U3.38
MISO  (via drill 0.38)
  Top 0.254: J6.17 9.75,7.35 9,8.1 4.55,8.1 v4.35,8.3
  Bottom 0.254: U3.28 4.8,8.75 v4.35,8.3
MOSI  (via drill 0.38)
  Top 0.254: J6.19 9.25,7.2 8.8,7.65 5.8,7.65 5.25,7.1 5.25,6.9 4.7,6.35 v4.3,6.35
  Bottom 0.254: 6.5,7.23 U3.25 5.9,7.25 5,6.35 v4.3,6.35
N$1
  Bottom 0.254: C5.1 13.9,14.65 | 13.9,14.65 Y1.1 | U3.1 13.75,12.75 13.75,14.2 13.9,14.65
N$3
  Bottom 0.254: U3.2 14.05,12.25 14.45,12.65 C6.1 15.1,13.8 Y1.2
N$4
  Top 0.254: R4.1 1.4,6.2 D3.A
N$5
  Top 0.254: R3.1 18.2,14 17.5,14.7 17.5,14.75 D2.2
N$6
  Top 0.254: U2.5 R1.1
N$7
  Top 0.254: U2.1 17,13.95 R3.2
N$8
  Bottom 0.254: U3.43 10.25,14.85 9.75,15.35 9.6,15.35 9.5,15.45 C7.1 9.55,15.45
N$9
  Bottom 0.305: U5.5 14.43,20.85 R10.2
N$10
  Bottom 0.305: U5.2 15.93,20.85 R11.2
N$11
  Bottom 0.203: U5.19 17.63,24.95 17.68,24.9 | 17.68,24.9 17.8,24.9 17.95,25.05 17.95,25.75 19.2,27.1 20.1,27.1 20.33,26.87 U6.5 | U5.20 17.53,24.45 17.58,24.5 17.58,24.8 17.68,24.9
N$12
  Bottom 0.203: U5.21 17.75,23.95 18.35,24.45 18.35,25.6 19.1,26.45 U6.6
N$14
  Bottom 0.203: U5.14 14.43,26.6 C14.1
N$15
  Bottom 0.203: U5.23 17.58,22.95 18.03,22.5 R12.2
N$16
  Bottom 0.203: U5.24 17.93,21.7 R13.2
N$21  (via drill 0.38)
  Top 0.305: J9.2 9.49,19.74 v9,19.2
  Bottom 0.305: U7.3 7.66,19.75 7.91,19.5 8.7,19.5 v9,19.2
N$24  (via drill 0.38)
  Top 0.203: v12.28,25.7 12.28,26 12.78,26.5 15.78,26.5 v16.23,26.55
  Bottom 0.203: U5.17 15.93,26.05 16.13,26.25 16.13,26.8 C15.1 16.28,27 v16.23,26.55 | U5.12 12.83,24.95 12.28,25.5 v12.28,25.7
N$27
  Bottom 0.305: U7.5 6.66,20.96 6.5,20.8 6.56,20.85 R15.2
N$28
  Bottom 0.305: U7.2 8.16,20.85 R16.2
N$29
  Bottom 0.203: U7.19 9.6,24.95 | 9.6,24.95 9.61,24.95 9.61,24.75 | U7.20 9.61,24.45 9.61,24.75 | 9.61,24.75 9.6,25.04 | U8.5 11.61,28.66 11.35,28.4 11.35,26.8 10.75,26.2 10.3,26.2 9.6,25.5 9.6,25.04 | 9.6,24.95 9.6,25.04
N$30
  Bottom 0.203: U7.21 9.75,23.95 10.05,24.25 10.05,25.35 10.5,25.8 10.95,25.8 11.75,26.6 11.75,27.76 U8.6
N$31
  Bottom 0.203: U7.14 6.66,26.5 C17.1
N$32
  Bottom 0.203: U7.23 9.86,22.95 10.11,22.7 R17.2
N$33
  Bottom 0.203: U7.24 9.66,22.4 R18.2
N$41  (via drill 0.38)
  Top 0.203: v4.61,25.75 4.61,26.1 5.01,26.5 7.01,26.5 v8.56,27.95
  Bottom 0.203: U7.17 8.16,26.05 8.56,26.45 8.56,27 C18.1 8.61,27.05 v8.56,27.95 | U7.12 4.96,24.95 4.61,25.25 v4.61,25.75
N$52
  Bottom 0.203: U16.21 25.12,14.23 24.83,13.95 C22.1
N$53
  Bottom 0.203: 24.85,15.52 C21.1
  Bottom 0.254: U16.24 24.85,15.52
RESET  (via drill 0.38)
  Top 0.254: J6.22 8.75,1.55 8.15,0.95 4.85,0.95 1.75,4.05 v1.75,4.25 | v2.35,17 2.55,17 2.75,16.8 3.9,16.8 4.3,17.2 6.7,17.2 v6.95,16.95
  Bottom 0.203: U3.40 8.75,14.1 7.9,14.95 7.9,15.7 6.95,16.65 v6.95,16.95
  Bottom 0.254: v1.75,4.25 1.45,4.55 1.45,9 1.8,9.35 1.8,12 2.5,12.7 2.45,14 2.1,14.35 2.1,14.75 R5.1 1.95,15.8 D4.A 1.93,16.53 v2.35,17
S1  (via drill 0.38)
  Top 0.203: v23.1,27.27 22.77,27.5 21.8,27.5 21.7,27.6 J10.1
  Bottom 0.203: U4.4 23.6,25.77 23.1,26.12 v23.1,27.27
S2  (via drill 0.38)
  Top 0.203: v21.8,24 21.8,21.73 J15.1
  Bottom 0.203: U4.3 23.02,25.32 22.6,24.9 22.6,24.4 22.2,24 v21.8,24
S3  (via drill 0.38)
  Top 0.203: J16.1 29.5,19.2 29.7,19.4 29.7,22.1 v28.4,23.3
  Bottom 0.203: U4.15 27.6,24.42 27.7,24.32 27.7,23.82 28.22,23.3 v28.4,23.3
S4  (via drill 0.38)
  Top 0.203: J17.1 28.73,25.15 v28.25,24.67
  Bottom 0.203: U4.14 27.75,24.87 27.95,24.67 v28.25,24.67
SCK  (via drill 0.38)
  Top 0.254: J6.15 10.25,7.5 9.2,8.55 5.05,8.55 4.7,8.9 4.05,8.9 3.75,8.6 3.75,7.9 | R4.2 3.15,7.25 3.75,7.85 3.75,7.9 | 3.75,7.9 v4.55,7.1
  Bottom 0.254: U3.26 5.35,7.75 4.75,7.1 v4.55,7.1
SCL0  (via drill 0.38)
  Top 0.203: 23,13.2 v22.85,13.2 22.95,13.1 24.5,13.1 25,13.6 J11.3
  Bottom 0.203: U9.6 21.8,5.8 21.3,6.3 21.3,10.5 22.3,11.5 22.9,11.5 | 22.8,13.2 v22.85,13.2 22.9,13.15 22.9,11.5 | R19.6 23.05,11.35 22.9,11.5
SCL1  (via drill 0.38)
  Top 0.203: 25,11.4 J12.3 25,11.3 24.1,10.4 23.3,10.4 23,10.1 v23,9.2
  Bottom 0.203: U9.9 22.7,7.45 22.7,8.9 v23,9.2 23,10.1 23.25,10.35 R19.2
SCL2  (via drill 0.38)
  Top 0.203: J14.3 25,8.6 v25.7,9.3
  Bottom 0.203: U9.13 26.8,6.8 27.1,7.1 27.1,8.3 26.7,8.7 26.5,8.7 25.9,9.3 v25.7,9.3 25.8,9.4 26.1,9.4 26.65,9.95 R14.6
SCL3  (via drill 0.38)
  Top 0.203: v27.2,5.25 25.75,5.25 25.2,4.7 25.2,4.12 J13.3
  Bottom 0.203: R14.2 27.65,9.85 27.9,9.6 27.9,7.8 28.7,7 28.7,6.4 27.55,5.25 v27.2,5.25 27.15,5.3 U9.16
SDA0  (via drill 0.38)
  Top 0.203: J11.4 24,15.3 23.6,14.9 23.4,14.3 v22.9,14.05
  Bottom 0.203: U9.5 21.7,5.3 20.9,6.1 20.9,10.9 22.2,12.2 22.2,13.6 22.65,14.05 v22.9,14.05 23.1,13.85 23.1,13.8 23.5,13.4 23.5,11.93 R19.8
SDA1  (via drill 0.38)
  Top 0.203: J12.4 24,11.4 23.5,10.9 22.8,10.9 v22.4,10.7
  Bottom 0.203: U9.8 22.3,6.8 22.1,7 22.1,10.1 22.4,10.4 v22.4,10.7 22.55,10.85 R19.4
SDA2  (via drill 0.38)
  Top 0.203: J14.4 24,8.7 24.3,9 24.5,9 v24.7,9.3
  Bottom 0.203: U9.12 26.25,8.35 25.9,8.7 25.4,8.7 24.9,9.2 24.9,9.3 v24.7,9.3 25.3,9.9 25.9,9.9 26.15,10.15 R14.8
SDA3  (via drill 0.38)
  Top 0.203: v28.1,6.7 28,6.6 27.7,6.6 27.5,6.4 26.9,6.4 26.2,5.7 25.6,5.7 24.9,5 24.3,5 24,4.7 J13.4
  Bottom 0.203: U9.15 27,5.8 27.3,6.1 27.5,6.1 v28.1,6.7 27.5,7.3 27.5,9 27.15,9.35 R14.4
SS  (via drill 0.38)
  Top 0.254: J6.21 8.75,7.1 8.65,7.2 6,7.2 5.75,6.95 5.75,6.8 4.8,5.85 v4.8,5.7
  Bottom 0.254: U3.27 5.2,8.25 4.65,7.7 4,7.7 3.7,7.4 3.7,6 4.15,5.55 4.65,5.55 v4.8,5.7
SWCLK  (via drill 0.38)
  Top 0.254: J6.20 9.25,1.4 9.95,0.7 v10.45,0.7
  Bottom 0.203: U3.45 11.25,15.95 11.8,16.5 11.8,16.8 12.2,17.2 13.1,17.2 13.35,17.45 | 13.35,17.45 13.7,17.8 14.65,17.8 14.95,18.1 16.8,18.1 18.05,16.85 18.05,12.75 18.85,11.95 18.85,5.1 18.5,4.75 18.5,3.1 18,2.6 17.8,2.6 17.4,2.2 17.4,1.15 16.75,0.5 | U5.8 12.75,22.95 12.5,22.7 12.5,18.3 13.35,17.45
  Bottom 0.254: v10.45,0.7 10.65,0.5 16.75,0.5
SWDIO  (via drill 0.38)
  Top 0.203: v14.15,17.2 13.8,17.2 12.2,18.8 12.2,21.6 11.35,22.45 5.5,22.45 v4.9,21.85
  Top 0.254: J6.18 9.75,1.6 10,1.35 10.65,1.35 11.5,0.5 15.85,0.5 v16.45,1.1
  Bottom 0.203: U3.46 11.75,13.95 11.65,14.05 11.65,15.8 12.65,16.8 13.45,16.8 14.05,17.4 14.4,17.4 | 14.4,17.4 14.85,17.4 15.15,17.7 16.6,17.7 17.65,16.65 17.65,12.55 18.45,11.75 18.4,5.55 18.4,5.25 18,4.85 18,3.6 17,2.5 17,1.5 16.5,1 v16.45,1.1 | U7.8 4.85,22.95 4.7,22.8 4.7,22.2 4.95,21.95 v4.9,21.85 | 14.4,17.4 14.45,17.35 v14.15,17.2
TINY_RST
  Bottom 0.203: U4.13 28.05,25.32 | 27.3,27.32 27.15,27.62 27.15,27.67 | R27.1 27.15,27.67 | 27.15,27.67 27.3,27.32 | 28.05,25.32 28,25.37 28,26.8 27.48,27.32 27.3,27.32 | 28.05,25.32 28.58,25.32 28.9,25 28.9,23.7 29,23.6 29,22.3 28.4,21.7 26.2,21.7 25.4,20.9 25.4,20.5 24.3,19.4 24.3,19 23.8,18.5 23.5,18.5 23.4,18.4 R33.2
USB_N  (via drill 0.38)
  Top 0.254: v4,12.75 4.3,13.05 J1.2
  Bottom 0.254: U3.33 5.5,11.25 v4,12.75
USB_P  (via drill 0.38)
  Top 0.254: v3.95,11.9 4,11.9 4.5,12.4 J1.3
  Bottom 0.254: U3.34 5.9,11.75 4.3,13.35 3.7,13.35 3.4,13.05 3.4,12.45 v3.95,11.9
VBATT  (via drill 0.38)
  Top 0.203: 3.75,26.95 3.55,26.75 v4,27.6 | 19.75,13.6 v19.8,13.6 19.75,13.55 19.8,13.65 | v20.2,2.4 20.2,3.2 19.45,3.95 | 19.7,4.2 19.7,5.15 R8.2
  Top 0.254: J6.4 13.25,1.65 13.5,1.4 14.3,1.4 16,3.1 16.2,3.1 16.5,3.4 18.9,3.4 19.45,3.95 19.7,4.2 | 13.95,13.15 14.05,13.25 U2.3 | 11.13,11.2 Q1.C 12.73,11.18 13.4,11.85 13.4,12.6 13.95,13.15 | 13.95,13.15 16.3,13.15 16.55,13.1 17,13.1 17.25,13.15 18.7,13.15 19.15,13.6 19.75,13.6 19.8,13.65 | C2.1 13.35,14.95
  Top 0.406: v14,27.95 13.8,28.1 13.3,27.6 12.5,27.6 11.6,28.5 10.4,28.5 9.6,29.3 8.25,29.3 6.6,27.65 v6.3,27.65 6,27.95 4.75,27.95 3.75,26.95 2.9,26.1 2.9,22 2.55,21.65 J2.2 2.5,19.8 3.05,19.25 5.35,19.25 5.65,19.55 5.65,20.75 6.85,21.95 11.1,21.95 11.7,21.35 11.7,18.75 11.05,18.1 11.05,17.35 11.2,17.2 12.5,17.2 13.25,16.45 13.25,15.05 13.35,14.95 14,14.3 U2.3
  Bottom 0.203: U5.15 14.93,26.3 C13.1 15.43,26.8 U5.16 | U7.15 7.16,26.3 C16.1 U7.16 | v4,27.6 4,26.8 3.05,26.55 SW1.3 | v19.8,13.6 19.8,13.5 20.1,13.2 20.1,2.6 20.2,2.5 v20.2,2.4
  Bottom 0.254: R30.1 20.97,17.77 20.8,17.6 20.8,16 19.8,15 v19.8,13.6
  Bottom 0.406: v14,27.95 14.29,27.8 14.48,27.55 C13.1 | v6.3,27.65 6.41,27.65 C16.1
VCC  (via drill 0.38)
  Top 0.203: 6.27,18.62 6.25,18.6 | v9.35,27.8 11.4,27.8 12.1,27.1 14.1,27.1 16.2,29.2 18.35,29.2 v18.75,28.8 20.6,28.8 21.2,28.2 22,28.2 22.3,27.9 27,27.9 27.7,28.6 27.7,28.8 v28.2,29.3
  Top 0.254: v10.3,4.8 10.5,5 14,5 14.2,5.16 | v10.35,17.9 10.15,17.7 9.05,17.7 8.45,18.25 7.75,18.25 7.4,18.6 6.25,18.6 3.45,18.6 v3.25,18.55 | 14.2,5.16 14.55,5.45 14.55,5.55 | 14.55,5.55 16.05,5.55 16.25,5.35 16.25,3.9 18.7,3.9 19.1,4.3 v19.1,4.5 | v14.7,5.65 14.75,5.6 14.55,5.55 | v11.85,17.9 11.85,17.7 12.7,17.7 14.4,16 15.3,16 15.4,16.1 17.2,16.1 17.6,16.5 v18.7,16.5 | v4.85,16.2 4.95,16.3 5.65,16.3 6.15,15.8 6.15,14.45 C3.1 7.9,13.65 U1.5 | J6.2 13.8,2.55 13.8,2.7 14.7,3.6 14.7,4.6 14.2,5.1 14.2,5.16
  Top 0.303: 21.4,18 20.5,18 v20.2,18.3 20.3,18.2 20.3,16.2 19.45,15.35 Q2.E
  Top 0.305: v24.96,18.98 24.97,19 22.9,19 22.65,18.75 22.65,18.25 22.5,18 21.4,18
  Bottom 0.203: 6.5,13.2 5.65,14.05 C11.1 | U9.20 25.7,3.3 25.9,3.1 25.9,2.25 C19.1 26.9,2.2 C20.1 27.15,1.75 26.6,1.2 20.4,1.2 18.9,2.7 18.9,3.4 19.1,3.6 v19.1,4.5 | v9.35,27.8 9.55,27.95 9.59,28.01 U8.1 | 24.83,14.8 C33.1 24.87,14.61 25.02,14.66 | U16.1 25.62,15.95 25.43,15.95 25.38,15.95 | 25.18,16.85 C34.1 | U16.3 26.77,16.54 26.93,16.7 26.93,17.3 26.93,17.4 27.28,17.65 28.3,17.65 29.1,16.85 29.1,15.9 28.73,15.52 | 3.17,14.92 R5.2 | U6.1 19.68,28.72 19.5,28.9 18.85,28.9 v18.75,28.8 | U4.9 26.05,27.37 C12.1 26.3,28.67 C25.1 26.7,29.57 27.15,29.57 | 27.15,29.57 R27.2 27.22,29.3 | 27.15,29.57 27.93,29.57 v28.2,29.3 28.5,29.3 29.4,28.4 29.4,22.1 28.6,21.3 26.4,21.3 25.8,20.7 25.8,19.8 25.9,19.8 | 24.87,18.9 v24.96,18.98
  Bottom 0.254: U3.17 10.75,5.25 v10.3,4.8 10.25,4.75 C9.1 | U3.44 10.75,15.3 10.6,15.4 C10.1 10.4,15.7 11.2,16.5 11.2,17.5 | U3.36 6.5,12.77 6.5,13.2 | C11.1 4.25,14.05 | 4.25,14.05 2.95,14.05 | 2.95,14.05 2.95,14.2 3.15,14.4 R5.2 3.15,15.55 3.17,15.57 D4.C 3.2,15.85 3.2,16.35 3.3,16.75 | 2.95,14.05 2.95,12.4 2.4,11.85 R6.2 2.75,11.6 R7.2 | 4.22,14.08 4.25,14.05 | 11.2,17.5 11.2,17.55 10.95,17.8 10.5,17.8 v10.35,17.9 | U3.6 14.1,10.25 14.15,10.3 15.2,10.3 C8.1 15.75,9.55 16.1,9.2 16.1,8.7 15.95,8.35 15.95,7.45 15.35,6.85 15.05,6.8 14.7,6.45 v14.7,5.65 | v19.1,4.5 19.25,4.65 19.25,12.1 18.45,12.9 18.45,16.35 v18.7,16.5 | v11.85,17.9 11.45,17.5 11.2,17.5 | U16.23 25.23,15.09 24.83,14.8 | C33.1 24.23,14.8 24.03,15 24.03,16.05 24.38,16.4 24.53,16.4 C34.1 | 25.02,14.66 U16.22 | U16.1 25.38,15.95 25.18,16.2 25.18,16.85 | U16.7 28.73,15.52 28.73,15.15 28.67,15.09 U16.8 | 3.3,16.75 4.3,16.75 4.7,16.45 4.7,16.35 v4.85,16.2 | 3.3,16.75 3,17.15 3,18.25 v3.25,18.55
  Bottom 0.303: v20.2,18.3 20.3,18.2 20.3,16.2 19.8,15.7 19.1,15.7 18.6,16.2 v18.7,16.5
  Bottom 0.305: 26.93,17.3 26.9,17.33 26.9,19.3 26.4,19.8 25.9,19.8 25.6,19.8 24.96,19.16 v24.96,18.98 25.25,18.7 25.25,16.92 25.18,16.85
VCC_IN
  Top 0.203: 11.55,13.5 U1.1 10.45,13.1 10.2,12.85 7.7,12.85 7.6,12.75 7.6,12.35 C1.1
  Top 0.254: Q1.E 9.48,10.23 10.15,10.9 10.15,11.5 10.5,11.85 12.3,11.85 12.55,12.1 12.55,13.5 11.55,13.5 11.55,15.73 D1.C 11.85,15.88
VSERVO  (via drill 0.38)
  Top 0.203: J10.2 J17.2 27.7,26.5 27.4,26.2 27.4,20.5 | 27.4,20.5 27.7,20.2 J16.2 | J15.2 21.27,20.1 22.4,20.1 22.6,19.9 | 27.4,20.5 27.4,20.3 27,19.9 26.3,19.9 25.9,20.3 23,20.3 22.6,19.9 | 22.6,19.9 22.6,19.7 v22.4,19.5
  Bottom 0.203: R30.2 22,19.9 v22.4,19.5

## Text on the board
tPlace: TinyZero Robot | ASM2027 Rev3 | ON | TinyCircuits.com | OFF | BATT | Motor 1 | Motor 2 | 0 | CHRG | 1 | 2 | P13 | 3
bPlace: BOOT
Document: FABRICATION DRAWING | NOTES: | 1. PRINTED CIRCUIT BOARD MADE FROM NEMA GRADE FR-4 EPOXY LAMINATE | WITH 1 OUNCE COPPER PLATING AND .024 THICKNESS. | 2. ALL DIMENSIONS ARE GIVEN IN INCHES. | 3. CIRCUIT PATHS ARE FOR REFERENCE ONLY. | 4. HOLE SIZES SHOWN ARE FINISHED DIAMETERS AFTER PLATING. | 5. BOARD PLATED USING REFLOW OR SIMILAR METHOD. | 6. BOARD TO HAVE BLUE SOLDER MASK ON PLATED SURFACES USING WET FILM | 7. SILKSCREEN BOARD USING WHITE INK. | SR100 OR SR1010 EPOXY. EQUIVALENT WET OR DRY FILM MAY BE USED. | 8. THE FOLLOWING INFORMATION APPLIES TO THIS BOARD: | * 2 COPPER LAYERS | * .024 BOARD THICKNESS | * REQUIRES TOP SIDE SILKSCREEN | Released under the Creative Commons Attribution Share-Alike 3.0 License | http://creativecommons.org/licenses/by-sa/3.0 | LilyPad Arduino Design by Leah Buechley and Sparkfun Electronics | Original Arduino Uno Design by Team Arduino | TinyDuino, TinyLily and TinyShield Designs by TinyCircuits | RobotZero | AS-PCB-ASM2027 | 3